# Altium PCB AD采集转接板.PcbDoc
Units mm, origin at the board's own origin, x right, y up, seen from the top; angles counter-clockwise.
Board outline 48.23 x 57.61 mm, 2 copper layers (Top Layer, Bottom Layer); 64 components, 48 nets, 208 pads, 143 vias.
Unrouted connection lines stored in the file: 2.
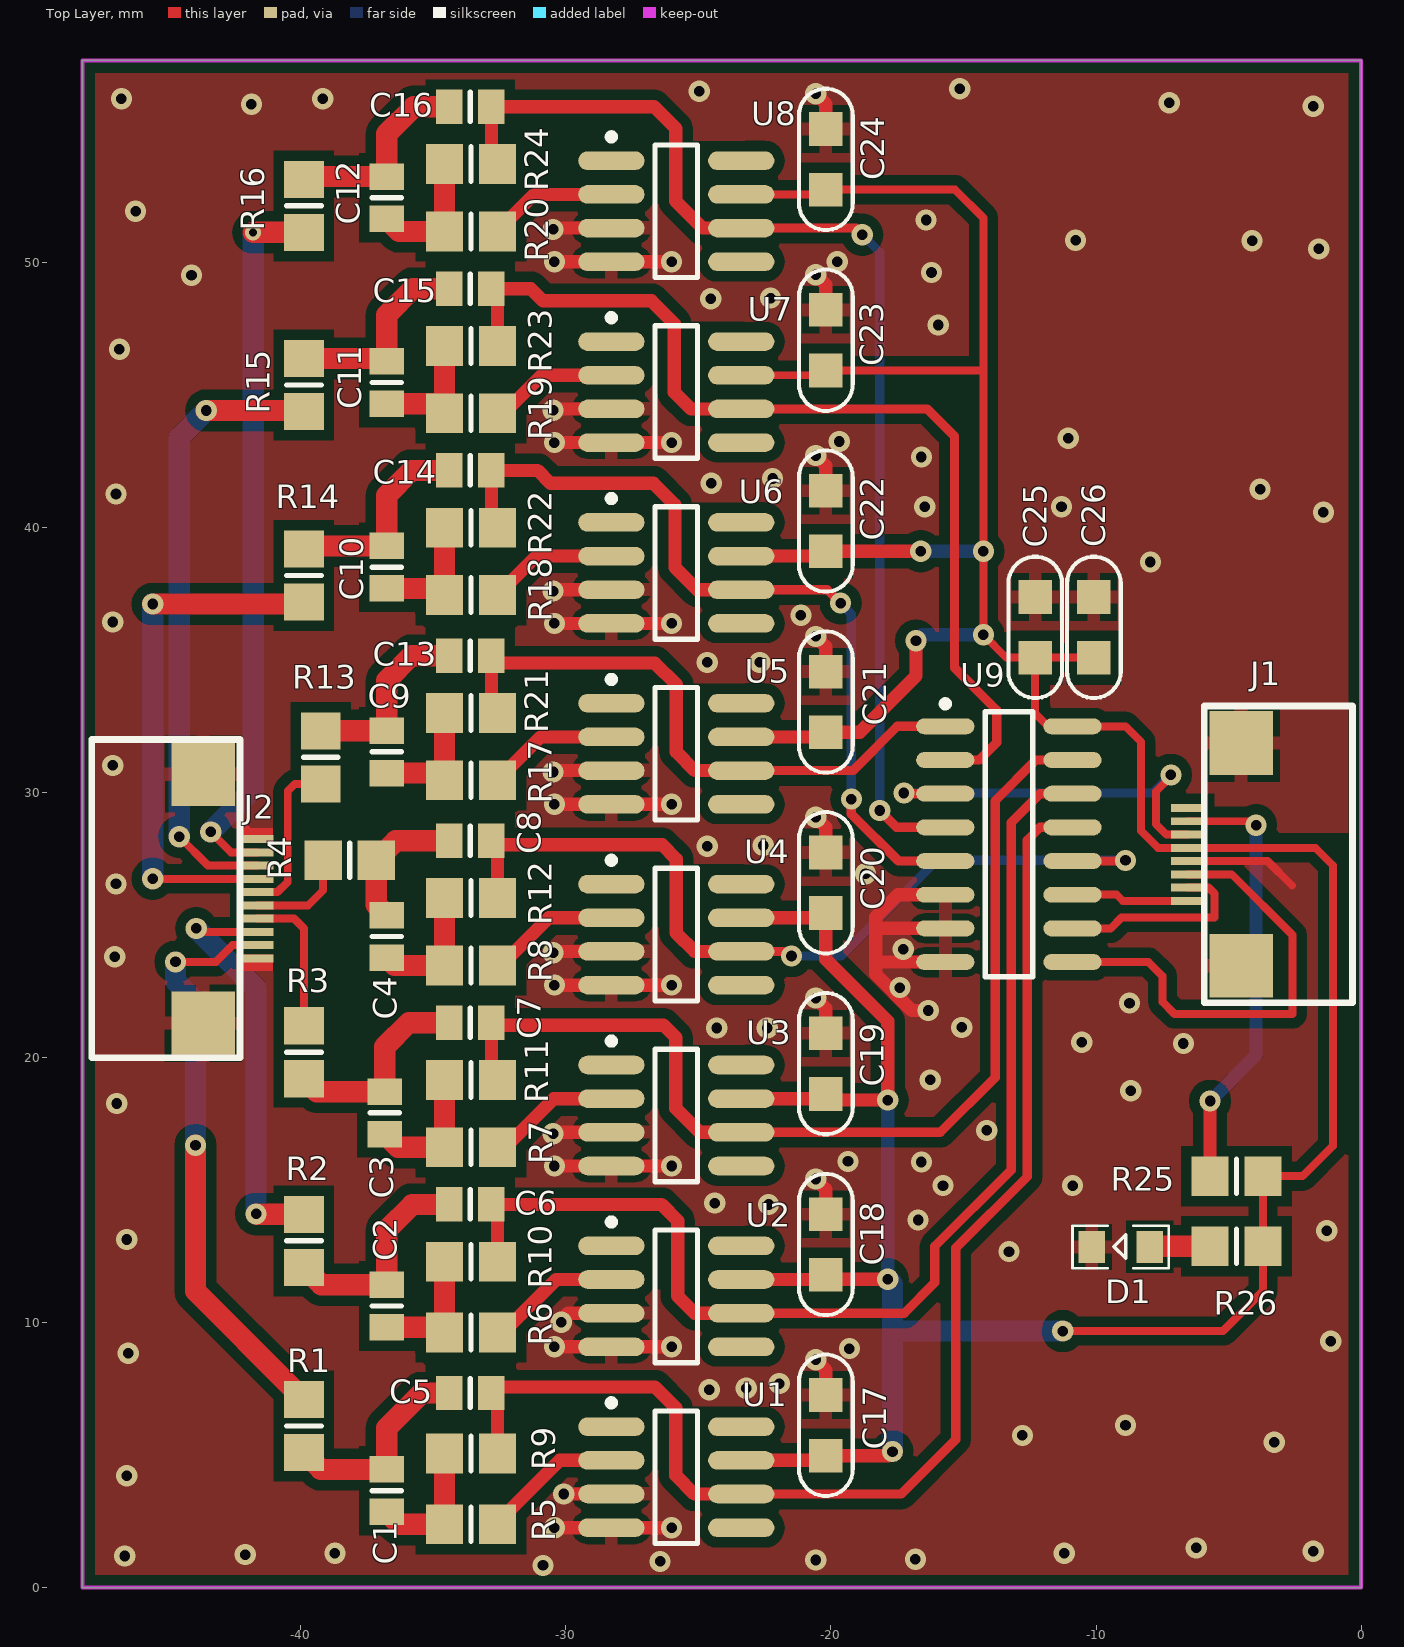
[diagram p0: Top Layer view]
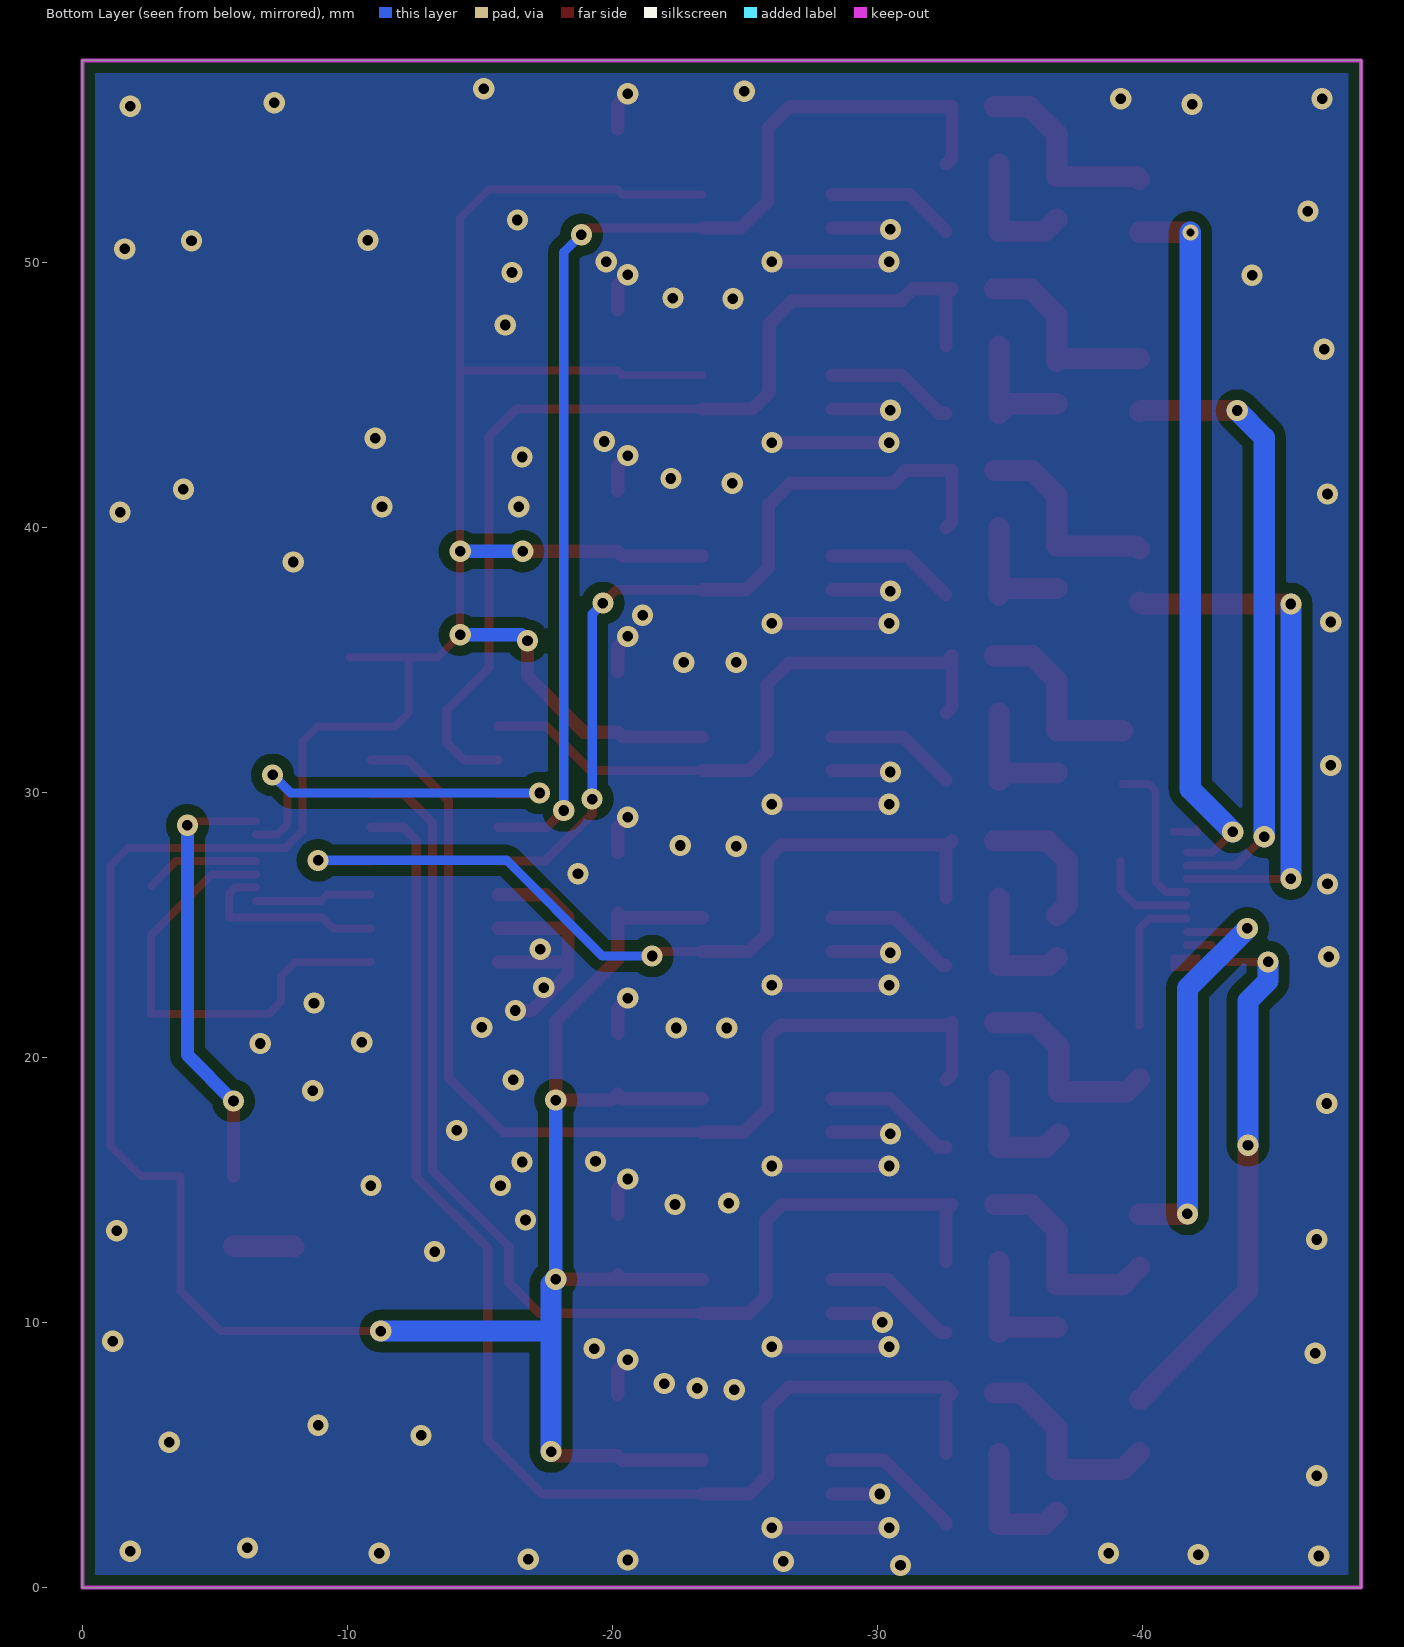
[diagram p1: Bottom Layer view, seen from below]

## Layer stack, top to bottom
Top Solder: solder mask 0.0102, Solder Resist, Dk 3.5
Top Layer: signal copper 0.0356
Dielectric 1: dielectric 0.32, FR-4, Dk 4.8
Bottom Layer: signal copper 0.0356
Bottom Solder: solder mask 0.0102, Solder Resist, Dk 3.5

## Board outline
-48.235,0 -48.235,57.607 0,57.607 0,0

## Design rules (kind name [scope] priority, off if disabled: settings)
Clearance Clearance_1 [InPolygon] p1: gap=0.4 ignorepadtopadclearanceinfootprint=FALSE except(0: Arc-Hole Track-Hole SMDPad-Hole THPad-Hole Via-Hole Fill-Hole Poly-Hole Region-Hole Text-Hole)
Clearance [All] p2: gap=0.2 ignorepadtopadclearanceinfootprint=FALSE
ComponentClearance [All] p1 off: gap=0.254 collisioncheckmode=3 verticalgap=0.254 showdistances=FALSE
Height [All] p1 off: minheight=0 maxheight=25.4 prefheight=12.7
MinimumSolderMaskSliver [All] p1 off: minsoldermaskwidth=0.254
PlaneConnect [All] p1: planeconnectstyle=Relief reliefexpansion=0.508 reliefentries=4 reliefconductorwidth=0.5 reliefairgap=0.254
PolygonConnect PolygonConnect_1 [isvia vs IsPolygon] p1: connectstyle=Direct reliefconductorwidth=0.254 reliefentries=4 polygonreliefangle="90 Angle" airgapwidth=0.254
PolygonConnect [All] p2: connectstyle=Relief reliefconductorwidth=0.5 reliefentries=4 polygonreliefangle="90 Angle" airgapwidth=0.254
RoutingVias [All] p1: holewidth=0.4 width=0.8 viastyle="Through Hole" minholewidth=0.3 minwidth=0.6 maxholewidth=0.711 maxwidth=1.27
SilkToSilkClearance [All] p1 off: silktosilkclearance=0.254
SilkToSolderMaskClearance [IsPad] p1 off: minsilkscreentomaskgap=0.254 clearancetoexposedcopper=TRUE
SolderMaskExpansion [All] p1: expansion=0.102
Width [All] p1: maxlimit=10 minlimit=0.1 preferedwidth=0.254 minimp=50.000000 maximp=50.000000 favimp=50.000000
24 further rules are at their usual default settings.

## Components (designator, comment, footprint, x,y, rotation, side; value= is the part's Value field where it differs from the comment)
C1 "220nF" 6-0805_L -36.754,3.658 r270 top
C2 "220nF" 6-0805_L -36.754,10.624 r270 top
C3 "220nF" 6-0805_L -36.83,17.907 r270 top
C4 "220nF" 6-0805_L -36.754,24.558 r270 top
C5 "1nF" 6-0805_L -33.604,7.341 r0 top
C6 "1nF" 6-0805_L -33.604,14.453 r0 top
C7 "1nF" 6-0805_L -33.604,21.311 r0 top
C8 "1nF" 6-0805_L -33.604,28.169 r0 top
C9 "220nF" 6-0805_L -36.754,31.525 r270 top
C10 "220nF" 6-0805_L -36.754,38.492 r270 top
C11 "220nF" 6-0805_L -36.754,45.459 r270 top
C12 "220nF" 6-0805_L -36.754,52.426 r270 top
C13 "1nF" 6-0805_L -33.604,35.154 r0 top
C14 "1nF" 6-0805_L -33.604,42.139 r0 top
C15 "1nF" 6-0805_L -33.604,48.997 r0 top
C16 "1nF" 6-0805_L -33.604,55.855 r0 top
C17 "100nF" 0805C -20.193,7.264 r270 top
C18 "100nF" 0805C -20.193,14.086 r270 top
C19 "100nF" 0805C -20.193,20.908 r270 top
C20 "100nF" 0805C -20.193,27.73 r270 top
C21 "100nF" 0805C -20.193,34.551 r270 top
C22 "100nF" 0805C -20.193,41.373 r270 top
C23 "100nF" 0805C -20.193,48.195 r270 top
C24 "100nF" 0805C -20.193,55.016 r270 top
C25 "100nF" 0805C -12.294,37.363 r270 top
C26 "1UF" 0805C -10.084,37.363 r270 top
D1 "LED_Red" LED0805 -10.155,12.855 r0 top
J1 "CON7" 8P软排线 -6.553,27.657 r90 top
J2 "CON8" 10P软排线 -41.656,25.987 r270 top
R1 "33" 6-0805_M -39.878,6.096 r270 top
R2 "33" 6-0805_M -39.878,13.081 r270 top
R3 "33" 6-0805_M -39.878,20.193 r270 top
R4 "33" 6-0805_M -38.151,27.432 r0 top
R5 "1K" 6-0805_M -33.579,2.388 r0 top
R6 "1K" 6-0805_M -33.579,9.627 r0 top
R7 "1K" 6-0805_M -33.579,16.612 r0 top
R8 "1K" 6-0805_M -33.579,23.47 r0 top
R9 "100M" 6-0805_M -33.579,5.055 r0 top
R10 "100M" 6-0805_M -33.579,12.294 r0 top
R11 "100M" 6-0805_M -33.579,19.152 r0 top
R12 "100M" 6-0805_M -33.579,26.01 r0 top
R13 "33" 6-0805_M -39.243,31.318 r90 top
R14 "33" 6-0805_M -39.878,38.176 r90 top
R15 "33" 6-0805_M -39.878,45.364 r90 top
R16 "33" 6-0805_M -39.878,52.121 r90 top
R17 "1K" 6-0805_M -33.579,30.455 r0 top
R18 "1K" 6-0805_M -33.579,37.44 r0 top
R19 "1K" 6-0805_M -33.579,44.298 r0 top
R20 "1K" 6-0805_M -33.579,51.156 r0 top
R21 "100M" 6-0805_M -33.579,32.995 r0 top
R22 "100M" 6-0805_M -33.579,39.98 r0 top
R23 "100M" 6-0805_M -33.579,46.838 r0 top
R24 "100M" 6-0805_M -33.579,53.696 r0 top
R25 "1k" 6-0805_M -4.699,15.519 r0 top
R26 "220" 6-0805_M -4.699,12.878 r0 top
U1 "CA3140" SO8_M -25.832,4.166 r0 top
U2 "CA3140" SO8_M -25.832,10.987 r0 top
U3 "CA3140" SO8_M -25.832,17.809 r0 top
U4 "CA3140" SO8_M -25.832,24.631 r0 top
U5 "CA3140" SO8_M -25.832,31.452 r0 top
U6 "CA3140" SO8_M -25.832,38.274 r0 top
U7 "CA3140" SO8_M -25.832,45.096 r0 top
U8 "CA3140" SO8_M -25.832,51.918 r0 top
U9 "CD4051BCM" M16A_N -13.284,28.042 r0 top

## Footprints (in the part's own frame and the unit in brackets; to place one, negate y for a bottom-side part, rotate by r counter-clockwise, add the part's x,y. Pads: shape width x height; smd on the part's side, far side on the other; paste and mask are expansions set on the pad)
6-0805_L [mm] "Chip Resistor, Body 2.0x1.2mm, IPC High Density"
  rect 1x1.3 smd: 1(-0.8,0) 2(0.8,0)
  silkscreen extent 0,-0.55 0,0.55, body extent -1.07,-0.7 1.07,0.7, height 0.7
6-0805_M [mm] "Chip Resistor, Body 2.0x1.2mm, IPC Low Density"
  rect 1.4x1.5 smd: 1(-1,0) 2(1,0)
  silkscreen extent 0,-0.65 0,0.65, body extent -1.07,-0.7 1.07,0.7, height 0.7
8P软排线 [mm] "8P母座"
  rect 0.3x1.25 smd: 1(-1.75,0) 2(-1.25,0) 3(-0.75,0) 4(-0.25,0) 5(0.25,0) 6(0.75,0) 7(1.25,0) 8(1.75,0)
  rect 2.4x2.4 smd: ""(-4.2,-2.025) ""(4.2,-2.025)
  silkscreen extent -5.6,-6.22 5.6,-0.63
10P软排线 [mm] "10P"
  rect 0.3x1.25 smd: 1(-2.25,0) 2(-1.75,0) 3(-1.25,0) 4(-0.75,0) 5(-0.25,0) 6(0.25,0) 7(0.75,0) 8(1.25,0) 9(1.75,0) 10(2.25,0)
  rect 2.4x2.4 smd: ""(-4.7,-2.025) ""(4.7,-2.025)
  silkscreen extent -6,-6.22 6,-0.63
0805C [mil]
  rect 50x50 smd: 1(0,0) 2(90,0)
  silkscreen extent -60,-40 150,40
LED0805 [mm]
  rect 1x1.2 smd: 1(2.179,-0.002) 2(-0.007,-0.002)
  silkscreen extent -0.73,-0.8 2.89,0.8
M16A_N [mm] "SOIC, 16-Leads, Body 9.9x3.9mm, Pitch 1.27mm, IPC Medium Density"
  oval 2.2x0.6 smd: 1(-2.4,4.445) 2(-2.4,3.175) 3(-2.4,1.905) 4(-2.4,0.635) 5(-2.4,-0.635) 6(-2.4,-1.905) 7(-2.4,-3.175) 8(-2.4,-4.445) 9(2.4,-4.445) 10(2.4,-3.175) 11(2.4,-1.905) 12(2.4,-0.635) 13(2.4,0.635) 14(2.4,1.905) 15(2.4,3.175) 16(2.4,4.445)
  silkscreen extent -2.52,-5 0.9,5.42, body extent -2,-5 2,5, height 1.75
SO8_M [mm] "SOIC, 8-Leads, Body 4.9x3.9mm, Pitch 1.27mm, IPC Low Density"
  oval 2.5x0.7 smd: 1(-2.45,1.905) 2(-2.45,0.635) 3(-2.45,-0.635) 4(-2.45,-1.905) 5(2.45,-1.905) 6(2.45,-0.635) 7(2.45,0.635) 8(2.45,1.905)
  silkscreen extent -2.57,-2.5 0.8,2.93, body extent -2,-2.5 2,2.5, height 1.75

## Part data
C1 C2 C3 C4 C5 C6 C7 C8 C9 C10 C11 C12 C13 C14 C15 C16 C17 C18 C19 C20 C21 C22 C23 C24 C25 C26: library part CAP, "电容"
D1: library part LED, "LED"
J1: "Connector"
J2: "连接器"
R1 R2 R3 R4 R5 R6 R7 R8 R9 R10 R11 R12 R13 R14 R15 R16 R17 R18 R19 R20 R21 R22 R23 R24 R25 R26: library part RES, "电阻"
U9: "8-Channel Analog Multiplexer/Demultiplexer"

## Via types
v1: diameter 0.8, hole 0.4, Top Layer to Bottom Layer, tented both sides, 142 vias
v2: diameter 0.6, hole 0.3, Top Layer to Bottom Layer, tented both sides, 1 vias

## Nets (pads, with @x,y where several pads share a name; then routed paths per layer and width w, separated by ;. In a path a pad name is that pad's centre, name@x,y a point inside that pad or via, vN(x,y) a via of type N, cw(c..) or ccw(c..) an arc to the next point about the centre after c; other vN are vias at no path point)
+5: C17.2 C18.2 C19.2 C20.2 C21.2 C22.2 C23.2 C24.2 C25.2 C26.2 J1.5 R25.2 R26.2 U1.7 U2.7 U3.7 U4.7 U5.7 U6.7 U7.7 U8.7 U9.16 | length 152
  Top Layer w0.3: U7.7 -20.371,45.731 C23.2 -14.289,45.909 -14.249,45.949 ; U8.7 -20.371,52.553 C24.2 -15.316,52.73 -14.249,51.664 -14.249,45.949 ; v1(-11.252,9.677) -5.207,9.677 -3.699,11.185 R26.2 R25.2 -2.21,15.519 -1.067,16.662 -1.067,27.245 -1.729,27.907 J1.5 -7.663,27.907 -8.306,28.55 -8.306,31.902 -8.89,32.487 U9.16 -11.811,32.487 -12.294,32.969 C25.2 ; C26.2 C25.2 ; -14.249,45.949 v1(-14.249,39.091) v1(-14.249,35.941) -13.386,35.077 C25.2
  Top Layer w0.5: U1.7 -20.371,4.801 C17.2 -17.831,4.978 v1(-17.678,5.131) ; U2.7 -20.371,11.622 C18.2@-20.36,11.633 ; U3.7 -20.371,18.444 C19.2 -19.961,18.39 v1(-17.856,18.39) -17.856,21.361 -20.193,23.698 C20.2 -20.371,25.266 U4.7 ; U5.7 -20.371,32.087 C21.2 -18.916,32.265 -16.789,34.392 v1(-16.789,35.712) ; U6.7 -20.371,38.909 C22.2 -16.615,39.087 v1(-16.612,39.091) ; C18.2 C18.2@-20.36,11.633 ; v1(-17.856,11.633) C18.2@-20.36,11.633
  Bottom Layer w0.5: v1(-17.856,11.633) v1(-17.856,18.39) ; v1(-16.789,35.712) -16.561,35.941 v1(-14.249,35.941) ; v1(-16.612,39.091) v1(-14.249,39.091)
  Bottom Layer w0.8: v1(-17.856,11.633) -17.678,11.455 -17.678,9.677 ; v1(-17.678,5.131) -17.678,9.677 ; v1(-11.252,9.677) -17.678,9.677
Address_A: J1.1 U9.11 | length 4.4
  Top Layer w0.3: U9.11 -9.222,26.137 -8.992,25.907 J1.1
Address_B: J1.2 U9.10 | length 7.5
  Top Layer w0.3: U9.10 -9.449,24.867 -9.042,25.273 -5.528,25.273 -5.528,26.178 -5.756,26.407 J1.2
Address_C: J1.3 U9.9 | length 17.6
  Top Layer w0.3: U9.9 -8.026,23.597 -7.493,23.063 -7.493,22.098 -7.036,21.641 -2.593,21.641 -2.593,24.614 -4.885,26.907 J1.3
Common_Out: J1.6 U9.3 | length 15.4
  Top Layer w0.3: v1(-7.175,30.655) -7.175,30.594 -7.745,30.024 -7.745,28.802 -7.35,28.407 J1.6
  Top Layer w0.35: v1(-17.247,29.972) -17.221,29.947 U9.3
  Bottom Layer w0.35: v1(-17.247,29.972) -7.858,29.972 v1(-7.175,30.655)
EX0: J1.7 R25.1 | length 16.6
  Top Layer w0.3: J1.7 -4.252,28.907 -4.098,28.753 v1(-3.962,28.753)
  Top Layer w0.5: R25.1 v1(-5.699,18.355)
  Bottom Layer w0.5: v1(-5.699,18.355) -3.962,20.091 v1(-3.962,28.753)
GND: C17.1 C18.1 C19.1 C20.1 C21.1 C22.1 C23.1 C24.1 C25.1 C26.1 D1.2 J1. J1.4 J2. J2.1 J2.10 U1.3 U1.4 U2.3 U2.4 U3.3 U3.4 U4.3 U4.4 U5.3 U5.4 U6.3 U6.4 U7.3 U7.4 U8.3 U8.4 U9.6 U9.7 U9.8 | length 81.7
  Top Layer w0.3: J1.4 -3.531,27.407 -2.616,26.492
  Top Layer w0.5: v1(-30.48,17.123) -30.429,17.174 U3.3 ; v1(-30.48,23.945) -30.429,23.996 U4.3 ; v1(-30.48,30.767) -30.429,30.817 U5.3 ; v1(-30.48,37.588) -30.429,37.639 U6.3 ; v1(-30.48,44.41) -30.429,44.461 U7.3 ; v1(-30.48,51.232) -30.429,51.283 U8.3 ; v1(-30.429,2.261) U1.4 v1(-26.01,2.261) ; v1(-30.429,9.082) U2.4 v1(-26.01,9.082) ; v1(-30.429,15.904) U3.4 v1(-26.01,15.904) ; v1(-30.429,22.726) U4.4 v1(-26.01,22.726) ; v1(-30.429,29.547) U5.4 v1(-26.01,29.547) ; v1(-30.429,36.369) U6.4 v1(-26.01,36.369) ; v1(-30.429,43.191) U7.4 v1(-26.01,43.191) ; v1(-30.429,50.013) U8.4 v1(-26.01,50.013) ; v1(-30.175,10.008) -30.175,10.098 -29.921,10.352 U2.3 ; v1(-30.074,3.531) U1.3 ; v1(-20.574,8.592) -20.193,8.211 C17.1 ; v1(-20.574,15.414) -20.193,15.033 C18.1 ; v1(-20.574,22.236) -20.193,21.855 C19.1 ; v1(-20.574,29.058) -20.193,28.677 C20.1 ; v1(-20.574,35.879) -20.193,35.498 C21.1 ; v1(-20.574,42.701) -20.193,42.32 C22.1 ; v1(-20.574,49.523) -20.193,49.142 C23.1 ; v1(-20.574,56.344) -20.193,55.963 C24.1 ; v1(-16.332,21.768) -16.942,21.768 -18.313,23.139 -18.313,23.571 ; U9.8 -18.288,23.597 -18.313,23.571 ; U9.7 -18.288,24.867 -18.313,24.841 ; U9.6 -17.475,26.137 -18.313,25.298 -18.313,24.841 ; -18.313,23.571 -18.313,24.841
  other v1: -30.861,0.838 -26.441,0.991 -20.574,1.041 -16.815,1.067 -46.634,1.194 -42.088,1.245 -38.71,1.295 -11.201,1.295 -1.803,1.372 -6.223,1.499 -46.558,4.216 -3.277,5.486 -12.776,5.74 -8.89,6.121 -24.587,7.468 -23.19,7.518 -21.946,7.696 -46.507,8.839 -19.304,9.017 -1.143,9.296 -13.284,12.675 -46.558,13.132 -1.295,13.462 -16.713,13.868 -22.352,14.453 -24.384,14.503 -15.773,15.164 -10.884,15.164 -16.586,16.053 -19.355,16.078 -14.122,17.247 -46.939,18.263 -8.687,18.745 -16.256,19.152 -6.706,20.523 -10.541,20.574 -24.308,21.107 -22.403,21.107 -15.062,21.133 -8.738,22.047 -17.399,22.631 -47.015,23.8 -17.272,24.079 -46.965,26.543 -18.694,26.924 -24.663,27.965 -22.555,27.991 -47.092,31.013 -24.663,34.9 -22.682,34.9 -47.092,36.424 -21.133,36.678 -7.95,38.684 -1.422,40.564 -16.459,40.767 -11.303,40.767 -46.965,41.25 -3.81,41.427 -24.511,41.656 -22.2,41.834 -16.586,42.647 -19.685,43.231 -11.049,43.358 -46.838,46.711 -15.951,47.625 -24.536,48.616 -22.276,48.641 -44.12,49.505 -16.205,49.606 -19.761,50.013 -1.6,50.495 -4.115,50.8 -10.77,50.825 -16.408,51.587 -46.228,51.918 -1.803,55.88 -41.859,55.956 -7.239,56.007 -46.761,56.159 -39.167,56.159 -24.968,56.439 -15.138,56.54
IN_1: J2.9 R1.1 | length 22
  Top Layer w0.3: v1@-44.724,23.515 v1(-44.724,23.603) -43.199,23.603 -42.565,24.237 J2.9
  Top Layer w0.8: v1(-43.967,16.688) -43.967,11.185 -40.228,7.446 -40.228,7.396 -39.928,7.096 R1.1
  Bottom Layer w0.8: v1(-44.724,23.603) -44.724,22.885 -43.967,22.129 v1(-43.967,16.688)
IN_2: J2.8 R2.1 | length 15.9
  Top Layer w0.3: v1(-43.942,24.867) -43.807,24.867 -43.677,24.737 J2.8
  Top Layer w0.8: v1(-41.681,14.097) -41.665,14.081 R2.1
  Bottom Layer w0.8: v1(-43.942,24.867) -41.681,22.606 v1(-41.681,14.097)
IN_3: J2.7 R3.1 | length 5.6
  Top Layer w0.3: J2.7 -40.248,25.237 -39.878,24.867 R3.1
IN_4: J2.6 R4.1 | length 3.9
  Top Layer w0.3: J2.6 -39.719,25.737 -39.151,26.305 R4.1
IN_5: J2.5 R13.1 | length 6.1
  Top Layer w0.3: J2.5 -40.87,26.237 -40.488,26.619 -40.488,30.048 -40.218,30.318 R13.1
IN_6: J2.4 R14.1 | length 20
  Top Layer w0.3: v1(-45.584,26.737) J2.4
  Top Layer w0.8: v1(-45.584,37.1) -39.954,37.1 R14.1
  Bottom Layer w0.8: v1(-45.584,26.737) v1(-45.584,37.1)
IN_7: J2.3 R15.1 | length 23.6
  Top Layer w0.3: v1(-44.577,28.321) -43.493,27.237 J2.3
  Top Layer w0.8: v1(-43.561,44.399) -39.913,44.399 R15.1
  Bottom Layer w0.8: v1(-44.577,28.321) -44.577,43.383 v1(-43.561,44.399)
IN_8: J2.2 R16.1 | length 27.2
  Top Layer w0.3: v1(-43.391,28.504) -42.624,27.737 J2.2
  Top Layer w0.8: v2(-41.792,51.121) R16.1
  Bottom Layer w0.8: v1(-43.391,28.504) -43.391,28.516 -41.792,30.115 v2(-41.792,51.121)
NetC1_1: C1.1 C5.1 R1.2 | length 7.8
  Top Layer w0.8: R1.2 -39.24,4.458 C1.1 -36.754,6.02 -35.433,7.341 C5.1
NetC1_2: C1.2 R5.1 R9.1 | length 5
  Top Layer w0.8: C1.2 -36.284,2.388 R5.1 R9.1
NetC2_1: C2.1 C6.1 R2.2 | length 8.2
  Top Layer w0.8: R2.2 -39.221,11.424 C2.1 -36.754,13.487 -35.789,14.453 C6.1
NetC2_2: C2.2 R6.1 R10.1 | length 4.9
  Top Layer w0.8: C2.2 -34.777,9.824 R6.1 R10.1
NetC3_1: C3.1 C7.1 R3.2 | length 7.7
  Top Layer w0.8: R3.2 -39.392,18.707 C3.1 -36.83,20.4 -35.919,21.311 C7.1
NetC3_2: C3.2 R7.1 R11.1 | length 5
  Top Layer w0.8: C3.2 -36.335,16.612 R7.1 R11.1
NetC4_1: C4.1 C8.1 R4.2 | length 5.3
  Top Layer w0.8: C4.1 -37.151,25.755 R4.2 -36.414,28.169 C8.1
NetC4_2: C4.2 R8.1 R12.1 | length 4.8
  Top Layer w0.8: C4.2 -36.465,23.47 R8.1 R12.1
NetC9_1: C9.1 C13.1 R13.2 | length 7.1
  Top Layer w0.8: R13.2 -36.761,32.318 C9.1 -36.754,34.214 -35.814,35.154 C13.1
NetC9_2: C9.2 R17.1 R21.1 | length 4.8
  Top Layer w0.8: C9.2 -34.849,30.725 R17.1 R21.1
NetC10_1: C10.1 C14.1 R14.2 | length 7.8
  Top Layer w0.8: R14.2 -39.762,39.292 C10.1 -36.754,41.199 -35.814,42.139 C14.1
NetC10_2: C10.2 R18.1 R22.1 | length 4.8
  Top Layer w0.8: C10.2 -34.831,37.692 R18.1 R22.1
NetC11_1: C11.1 C15.1 R15.2 | length 7.7
  Top Layer w0.8: R15.2 -36.859,46.364 C11.1 -36.754,48.006 -35.763,48.997 C15.1
NetC11_2: C11.2 R19.1 R23.1 | length 4.9
  Top Layer w0.8: C11.2 -34.94,44.659 R19.1 R23.1
NetC12_1: C12.1 C16.1 R16.2 | length 7.6
  Top Layer w0.8: R16.2 -39.773,53.226 C12.1 -36.754,54.839 -35.738,55.855 C16.1
NetC12_2: C12.2 R20.1 R24.1 | length 4.9
  Top Layer w0.8: C12.2 -36.284,51.156 R20.1 R24.1
NetD1_1: D1.1 R26.1 | length 2.3
  Top Layer w0.8: D1.1 -7.95,12.878 R26.1
NetR5_2: R5.2 U1.2 | length 5.3
  Top Layer w0.5: R5.2 -32.579,2.447 -30.226,4.801 U1.2
NetR6_2: R6.2 U2.2 | length 5.1
  Top Layer w0.5: R6.2 -32.36,9.627 -30.364,11.622 U2.2
NetR7_2: R7.2 U3.2 | length 5.1
  Top Layer w0.5: R7.2 -32.283,16.612 -30.451,18.444 U3.2
NetR8_2: R8.2 U4.2 | length 5
  Top Layer w0.5: R8.2 -32.436,23.47 -30.64,25.266 U4.2
NetR17_2: R17.2 U5.2 | length 5
  Top Layer w0.5: R17.2 -30.946,32.087 U5.2
NetR18_2: R18.2 U6.2 | length 4.9
  Top Layer w0.5: R18.2 -31.109,38.909 U6.2
NetR19_2: R19.2 U7.2 | length 4.9
  Top Layer w0.5: R19.2 -32.334,44.298 -30.901,45.731 U7.2
NetR20_2: R20.2 U8.2 | length 4.9
  Top Layer w0.5: R20.2 -31.182,52.553 U8.2
OUT_1: C5.2 R9.2 U1.6 U9.13 | length 49.6
  Top Layer w0.35: U1.6 -17.348,3.531 -15.291,5.588 -15.291,12.811 -12.598,15.503 -12.598,28.194 -12.116,28.677 U9.13
  Top Layer w0.5: R9.2 -32.579,7.115 C5.2 -32.576,7.569 -26.645,7.569 -25.857,6.782 -25.857,4.242 -25.146,3.531 U1.6
OUT_2: C6.2 R10.2 U2.6 U9.14 | length 44.1
  Top Layer w0.35: U2.6 -17.232,10.352 -16.078,11.506 -16.078,12.878 -13.202,15.754 -13.202,28.86 -12.116,29.947 U9.14
  Top Layer w0.5: R10.2 -32.579,14.227 C6.2 -26.391,14.453 -25.781,13.843 -25.781,10.998 -25.135,10.352 U2.6
OUT_3: C7.2 R11.2 U3.6 U9.15 | length 39.4
  Top Layer w0.35: U3.6 -15.871,17.174 -13.806,19.239 -13.806,29.678 -12.268,31.217 U9.15
  Top Layer w0.5: R11.2 -32.804,19.377 C7.2 -32.703,21.209 -26.314,21.209 -25.857,20.752 -25.857,18.085 -24.946,17.174 U3.6
OUT_4: C8.2 R12.2 U4.6 U9.12 | length 32.9
  Top Layer w0.35: U4.6 -21.659,23.996 v1(-21.488,23.825) ; U9.12 -8.915,27.407 v1(-8.89,27.432)
  Top Layer w0.5: C8.2 C8.2@-32.652,28.016 ; R12.2 -32.579,27.943 C8.2@-32.652,28.016 ; U4.6 -25.139,23.996 -25.832,24.689 -25.832,27.483 -26.365,28.016 C8.2@-32.652,28.016
  Bottom Layer w0.35: v1(-21.488,23.825) -19.609,23.825 -16.002,27.432 v1(-8.89,27.432)
OUT_5: C13.2 R21.2 U5.6 U9.1 | length 23.4
  Top Layer w0.35: U5.6 -19.17,30.817 -17.501,32.487 U9.1
  Top Layer w0.5: R21.2 -32.804,33.22 C13.2 -32.525,34.874 -26.637,34.874 -25.832,34.069 -25.832,31.521 -25.128,30.817 U5.6
OUT_6: C14.2 R22.2 U6.6 U9.5 | length 31.3
  Top Layer w0.35: U6.6 -20.139,37.639 v1(-19.634,37.135) ; v1(-19.228,29.743) -19.228,29.185 -17.45,27.407 U9.5
  Top Layer w0.5: R22.2 -32.804,40.205 C14.2 -31.064,42.139 -30.582,41.656 -26.695,41.656 -25.883,40.843 -25.883,38.481 -25.041,37.639 U6.6
  Bottom Layer w0.35: v1(-19.634,37.135) -19.228,36.728 v1(-19.228,29.743)
OUT_7: C15.2 R23.2 U7.6 U9.2 | length 38
  Top Layer w0.35: U7.6 -16.368,44.461 -15.342,43.434 -15.342,34.696 -13.741,33.096 -13.741,31.877 -14.402,31.217 U9.2
  Top Layer w0.5: R23.2 -32.579,48.771 C15.2 -31.318,48.997 -30.861,48.539 -26.772,48.539 -25.908,47.676 -25.908,45.091 -25.278,44.461 U7.6
OUT_8: C16.2 R24.2 U8.6 U9.4 | length 44.6
  Top Layer w0.35: U8.6 -19.05,51.283 v1@-18.796,51.029 ; v1(-18.161,29.312) -17.526,28.677 U9.4
  Top Layer w0.5: R24.2 -32.804,53.921 C16.2 -26.67,55.855 -25.857,55.042 -25.857,52.299 -24.841,51.283 U8.6
  Bottom Layer w0.35: v1(-18.821,51.029) -18.161,50.368 v1(-18.161,29.312)
pads on no net: J1.8 U1.1 U1.5 U1.8 U2.1 U2.5 U2.8 U3.1 U3.5 U3.8 U4.1 U4.5 U4.8 U5.1 U5.5 U5.8 U6.1 U6.5 U6.8 U7.1 U7.5 U7.8 U8.1 U8.5 U8.8

## Polygon pours and split planes (outlines as drawn)
GND on Bottom Layer "Top Layer-No Net" (solid, remove dead copper, pour order 14): -48.235,0 0,0 0,57.531 -0.076,57.607 -48.235,57.607
GND on Top Layer "Top Layer-No Net" (solid, remove dead copper, pour order 16): -48.235,0 0,0 0,57.607 -48.235,57.607 -48.235,0

## Keep-outs
Top Layer:
  region: -15.291,35.154
Keep-Out Layer:
  the board outline again, w0.15

## Other copper
Top Layer:
  region net GND: -41.048,28.372 -41.048,28.399 -41.048,28.641 -41.884,28.641 -42.011,28.768 -42.164,28.614 -42.164,28.346
  pour cut-out: -40.46,24.656 -40.48,24.676 -40.631,24.676 -40.631,23.479 -40.777,23.333 -40.761,23.317 -40.437,23.317 -40.437,22.295 -41.028,22.293 -41.028,23.223
  region net GND: -42.164,23.876 -41.046,23.876 -41.046,23.241 -41.072,23.266 -42.189,23.266
  pour cut-out: -1.729,28.467 -1.465,28.473 -0.457,28.473 -0.457,27.619 -0.484,27.592 -0.884,27.991 -1.118,27.991 -0.483,27.356
  pour cut-out: -7.578,29.957 -7.578,28.883 -7.612,28.849 -7.745,28.849 -7.745,29.919 -7.849,30.023
  pour cut-out: -28.956,54.585 -23.241,54.585 -23.241,52.174 -28.956,52.174
  pour cut-out: -28.956,47.763 -23.241,47.763 -23.241,45.353 -28.956,45.353
  pour cut-out: -28.956,40.941 -23.241,40.941 -23.241,38.531 -28.956,38.531
  pour cut-out: -28.956,34.119 -23.241,34.119 -23.241,31.709 -28.956,31.709
  pour cut-out: -28.956,27.298 -23.241,27.298 -23.241,24.888 -28.956,24.888
  pour cut-out: -28.956,20.476 -23.241,20.476 -23.241,18.066 -28.956,18.066
  pour cut-out: -28.956,13.654 -23.241,13.654 -23.241,11.244 -28.956,11.244
  pour cut-out: -28.956,6.833 -23.241,6.833 -23.241,4.422 -28.956,4.422

## Silkscreen, mask and mechanical layers (free items; w line width, h text height)
Mechanical 1:
  region: -47.168,38.329
  region: -47.168,37.694